# Altium PCB PCB2.PcbDoc
Units mm, origin at the board's own origin, x right, y up, seen from the top; angles counter-clockwise.
Board outline 80 x 70 mm, 2 copper layers (Top Layer, Bottom Layer); 32 components, 40 nets, 127 pads, 19 vias.
Unrouted connection lines stored in the file: 7.
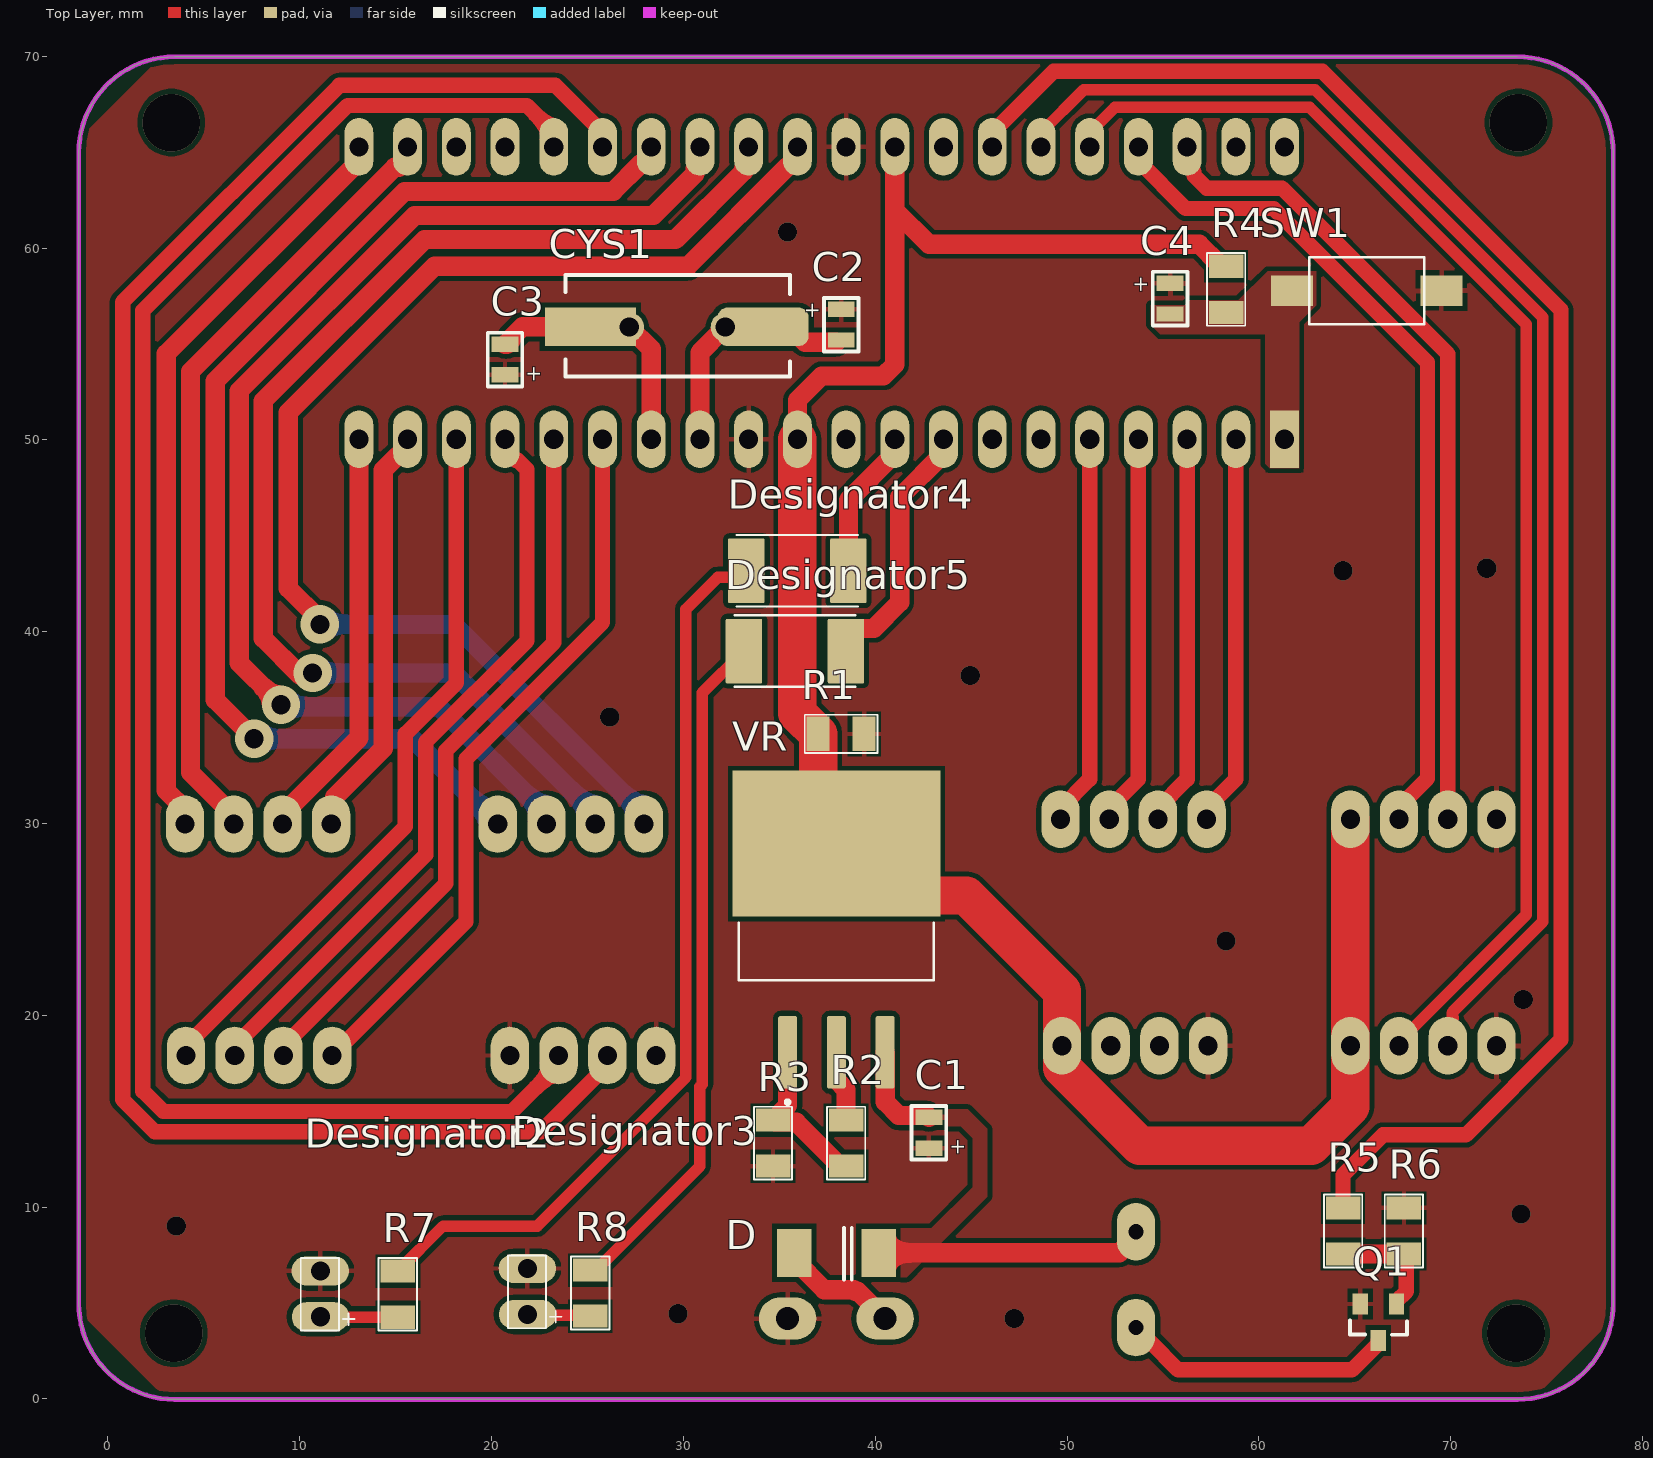
[diagram p0: Top Layer view]
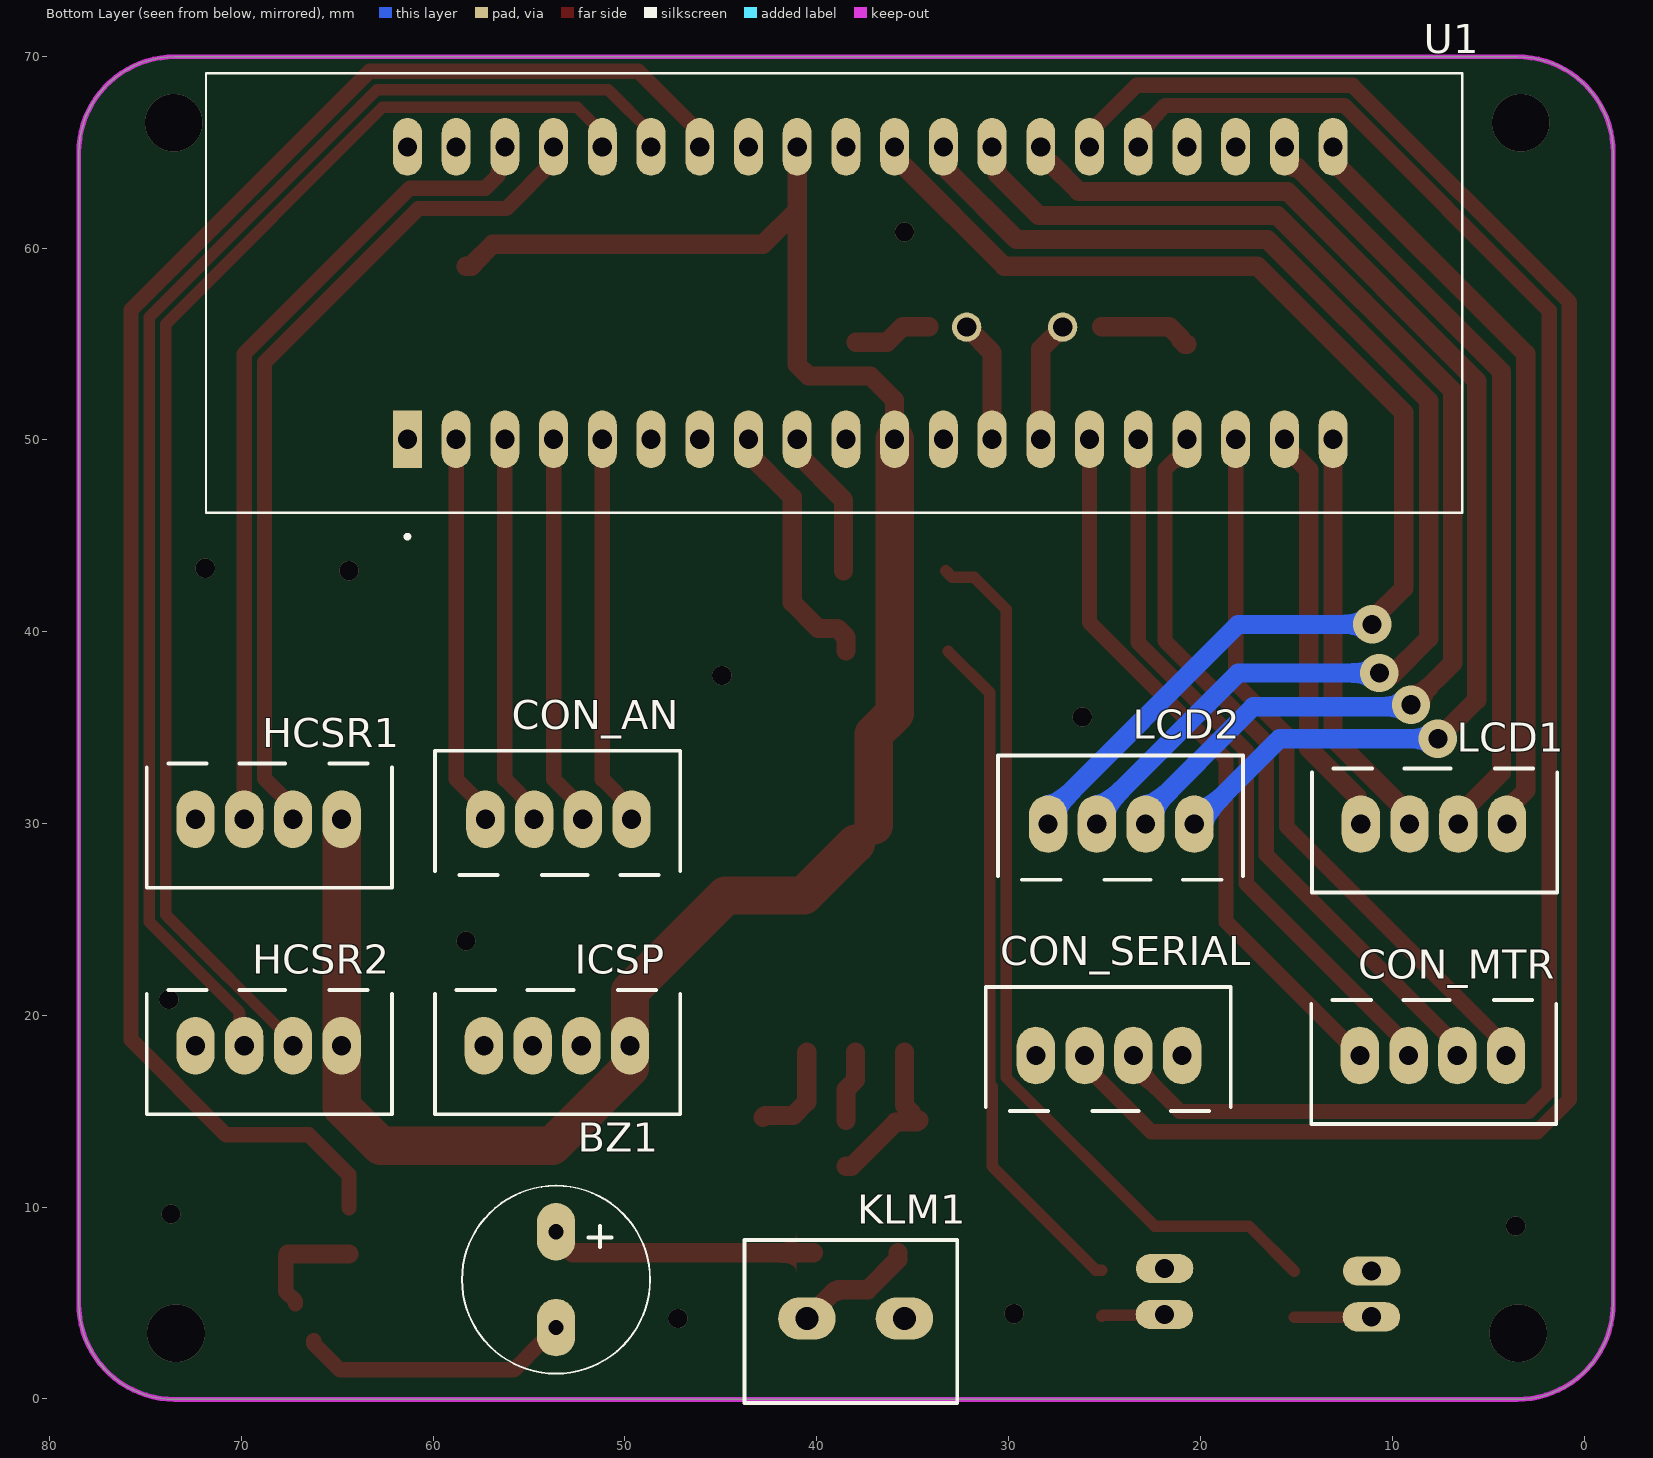
[diagram p1: Bottom Layer view, seen from below]
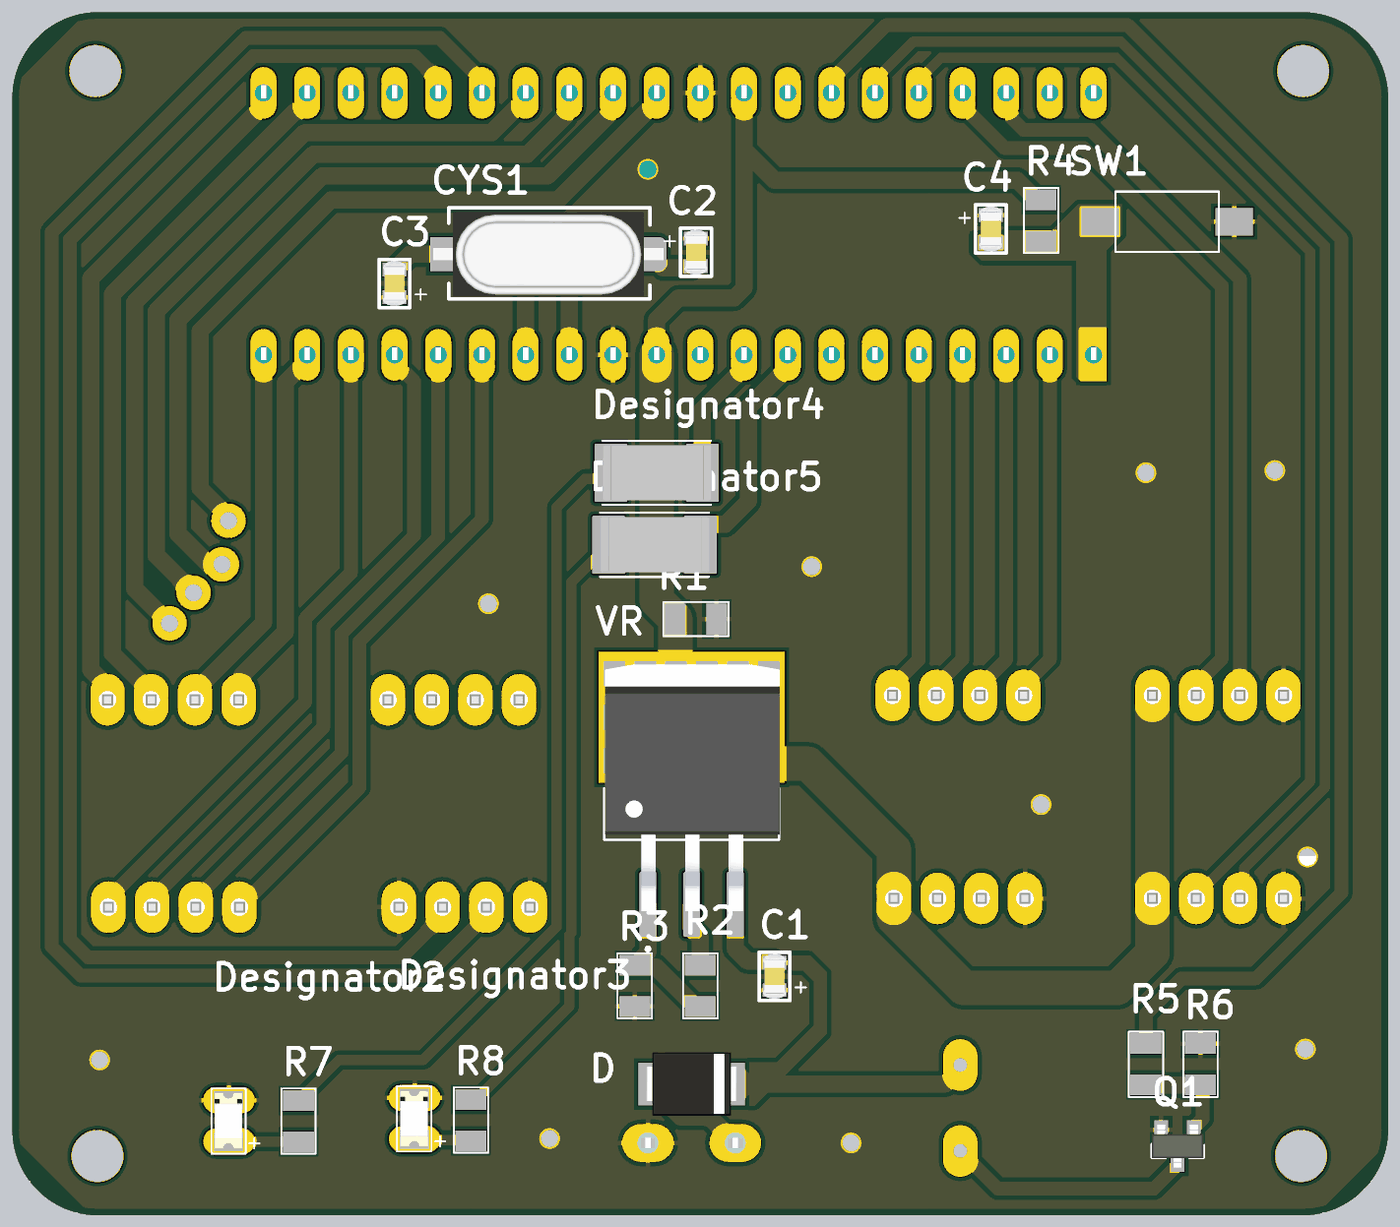
[diagram p2: 3D render of the assembled board from above, using the file's embedded part models]
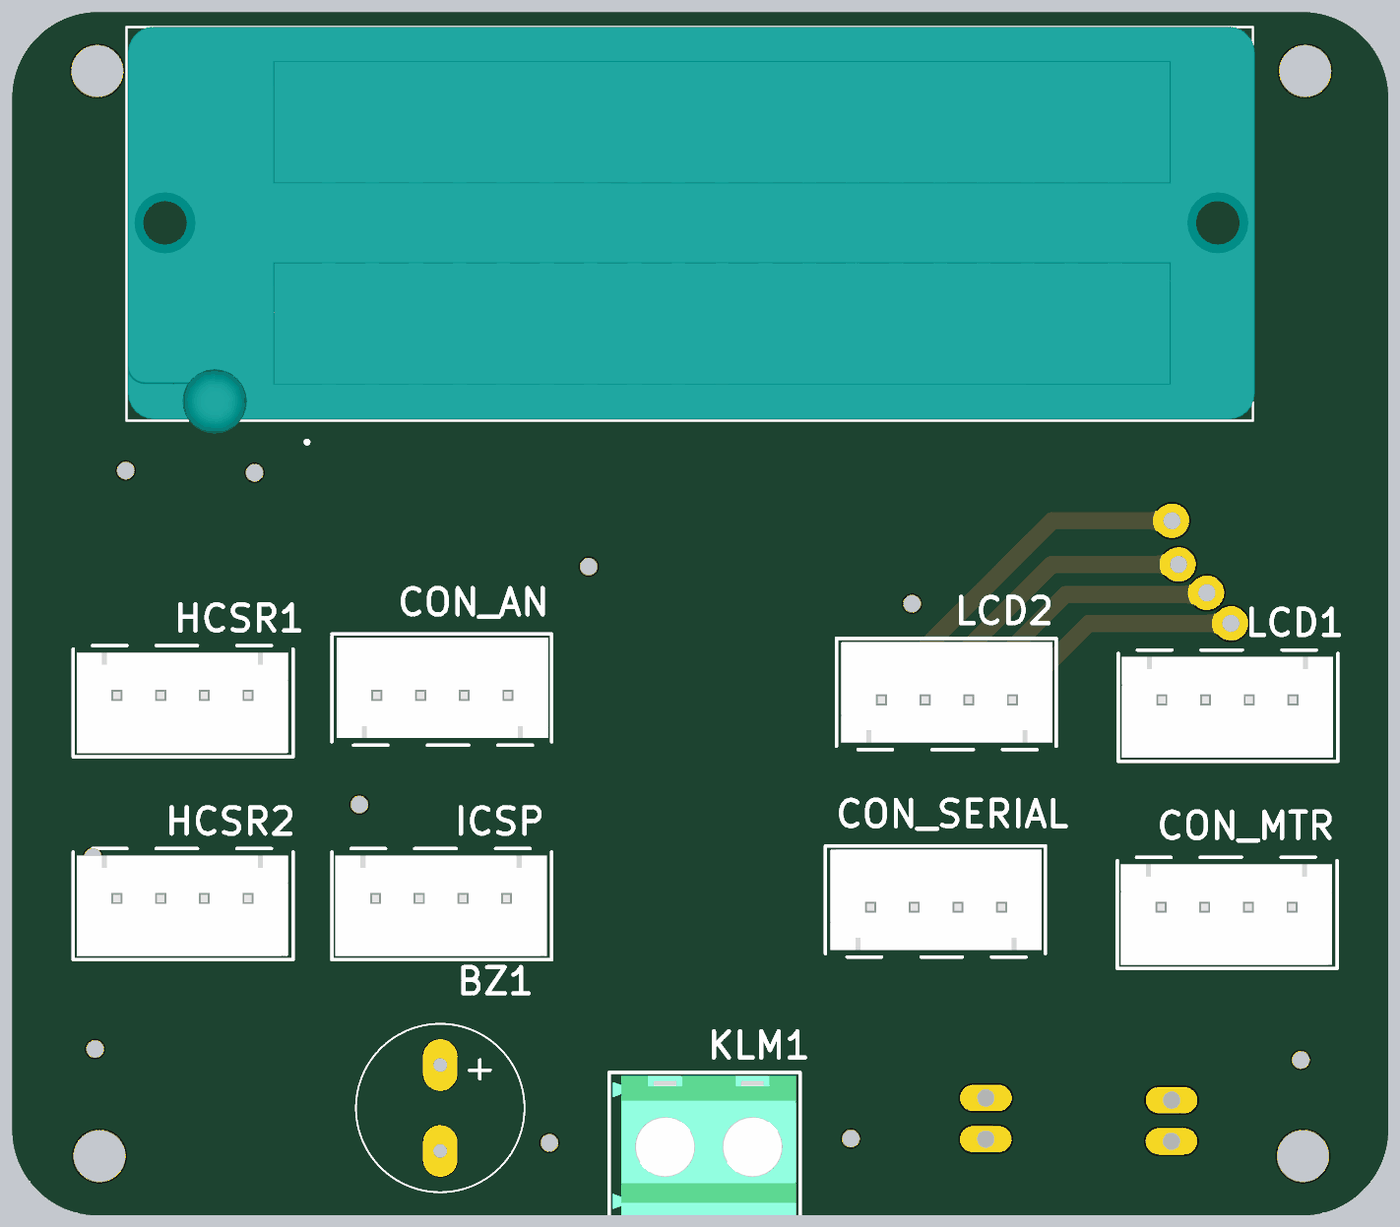
[diagram p3: 3D render of the assembled board from below, using the file's embedded part models]

## Layer stack, top to bottom
Top Solder: solder mask 0.0102, Solder Resist, Dk 3.5
Top Layer: signal copper 0.0356
Dielectric 1: dielectric 0.32, FR-4, Dk 4.8
Bottom Layer: signal copper 0.0356
Bottom Solder: solder mask 0.0102, Solder Resist, Dk 3.5

## Board outline
-1.524,4.977 -1.524,64.977 cw(c3.476,64.977) 3.476,69.977 73.476,69.977 cw(c73.476,64.977) 78.476,64.977 78.476,4.977 cw(c73.476,4.977) 73.476,-0.023 3.476,-0.023 cw(c3.476,4.977)

## Design rules (kind name [scope] priority, off if disabled: settings)
Clearance [All] p1: gap=0.254 ignorepadtopadclearanceinfootprint=FALSE except(0: Arc-Hole Track-Hole SMDPad-Hole THPad-Hole Via-Hole Fill-Hole Poly-Hole Region-Hole Text-Hole)
PolygonConnect [All] p1: connectstyle=Relief reliefconductorwidth=0.254 reliefentries=4 polygonreliefangle="90 Angle" airgapwidth=0.254
RoutingVias [All] p1: holewidth=0.711 width=1.27 viastyle="Through Hole" minholewidth=0.711 minwidth=1.27 maxholewidth=0.711 maxwidth=1.27
SolderMaskExpansion [All] p1: expansion=0.102 istentingtop=FALSE
Width [All] p1: maxlimit=2 minlimit=0.254 preferedwidth=0.254
30 further rules are at their usual default settings.

## Classes and differential pairs
component class Sheet2: BZ1 C1 C2 C3 C4 CON_AN CON_MTR CON_SERIAL CYS1 D HCSR1 HCSR2 ICSP KLM1 L1 L2 LCD1 LCD2 Q1 R1 R2 R3 R4 R5 R6 R7 R8 SW1 U1 VR

## Components (designator, comment, footprint, x,y, rotation, side; value= is the part's Value field where it differs from the comment)
BZ1 "Buzzer" CMI-9605IC 53.594,6.223 r180 bottom
C1 "CAP 100nF 0805" CAP_805 42.799,13.881 r90 top
C2 "CAP 22uf 0805" CAP_805 38.227,56.007 r270 top
C3 "CAP 22uf 0805" CAP_805 20.701,54.191 r90 top
C4 "CAP 100nF 0805" CAP_805 55.372,57.366 r270 top
CON_AN "4 PIN CON" "4 PIN 2.54MM" 53.467,30.226 r180 bottom
CON_MTR "4 PIN CON" "4 PIN 2.54MM" 7.874,17.907 r0 bottom
CON_SERIAL "4 PIN CON" "4 PIN 2.54MM" 24.765,17.907 r180 bottom
CYS1 "CRYSTAL - TH" "Kristal - HC-49Us -th" 29.651,55.899 r180 top
D "S3M Diyot" DO214AA 37.973,7.62 r0 top
Designator2 "Comment" "LED - TH" 11.049,5.461 r90 top
Designator3 "Comment" "LED - TH" 21.844,5.588 r90 top
Designator4 "Comment" RESC6331X70N 35.941,43.18 r0 top
Designator5 "Comment" RESC6331X70N 35.814,38.989 r0 top
HCSR1 "4 PIN CON" "4 PIN 2.54MM" 68.58,30.226 r0 bottom
HCSR2 "4 PIN CON" "4 PIN 2.54MM" 68.58,18.415 r0 bottom
ICSP "4 PIN CON" "4 PIN 2.54MM" 53.545,18.415 r0 bottom
KLM1 "2 Pin Klemens" "5.08mm-2 pin" 37.973,4.191 r180 bottom
LCD1 "4 PIN CON" "4 PIN 2.54MM" 7.825,29.972 r0 bottom
LCD2 "4 PIN CON" "4 PIN 2.54MM" 24.13,29.972 r180 bottom
Q1 "SSM3K357R,LF" SOT-23F 66.228,4.003 r180 top
R1 "RES 10K 1206" RES_1206 38.227,34.671 r0 top
R2 "RES 10K 1206" RES_1206 38.481,13.335 r270 top
R3 "RES 10K 1206" RES_1206 34.671,13.335 r90 top
R4 "RES 10K 1206" RES_1206 58.293,57.855 r90 top
R5 "RES 10K 1206" RES_1206 64.389,8.763 r270 top
R6 "RES 10K 1206" RES_1206 67.564,8.763 r90 top
R7 "RES 10K 1206" RES_1206 15.113,5.461 r90 top
R8 "RES 10K 1206" RES_1206 25.146,5.518 r90 top
SW1 "1437566-3" SW_1437566-3 65.622,57.785 r180 top
U1 "PIC16F887-I/P" PIC_ZIF_SOCKET 37.211,57.658 r90 bottom
VR "LM1085IS-ADJ" TO254P1524X483-4N 37.973,24.476 r90 top

## Footprints (in the part's own frame and the unit in brackets; to place one, negate y for a bottom-side part, rotate by r counter-clockwise, add the part's x,y. Pads: shape width x height; smd on the part's side, far side on the other; paste and mask are expansions set on the pad)
"4 PIN 2.54MM" [mm]
  oval 2x3 hole 1 mask+0.05: 1(-3.81,0) 2(-1.27,0) 3(1.27,0) 4(3.81,0)
  silkscreen extent -6.43,-2.9 6.35,3.57, body extent -6.15,-2.49 6.15,3.35, height 7.21
"5.08mm-2 pin" [mm]
  oval 3x2.2 hole 1.2 mask+0.05: 1(-2.54,0) 2(2.54,0)
  silkscreen extent -5.8,-4.4 5.3,4.1, body extent -5.59,-4.2 5.07,3.9, height 10.2
CAP_805 [mm]
  rect 0.8x1.4 smd mask+0.05: 1(-0.8,0) 2(0.8,0)
  silkscreen extent -1.4,-0.9 1.4,0.9, body extent -1.3,-0.68 1.3,0.68, height 0.9
CMI-9605IC [mm]
  oval 2x3 hole 0.8 mask+0.05: 1(0,2.5) 2(0,-2.5)
  silkscreen extent -4.9,-4.9 4.9,4.9, body extent -4.8,-4.8 4.8,5.9, height 5.2
DO214AA [mm]
  rect 1.8x2.5 smd mask+0.05: 1(-2.2,0) 2(2.2,0)
  silkscreen extent 0.4,-1.4 0.8,1.3, body extent -2.65,-1.85 2.65,1.85, height 2.3
"Kristal - HC-49Us -th" [mm]
  rrect50% 4.75x2 smd mask+0.05: 1(-4.5,0)
  rect 4.75x2 smd mask+0.05: 2(4.5,0)
  round 1.524 hole 1: 3(-2.531,0.019) 4(2.473,0.019)
  silkscreen extent -5.9,-2.7 5.8,2.6, body extent -6.7,-2.45 6.7,2.45, height 5.08
"LED - TH" [mm]
  rect 1.1x1.7 smd mask+0.05: 1(-1.2,0) 2(1.2,0)
  oval 1.524x3 hole 1: 19(-1.178,-0.032) 20(1.218,-0.023)
  silkscreen extent -1.9,-1.8 1.9,1, body extent -1.59,-0.8 1.61,0.8, height 1.1
PIC_ZIF_SOCKET [mm]
  rect 3x1.508 hole 1: 1(-7.62,24.13)
  oval 3x1.508 hole 1: 2(-7.62,21.59) 3(-7.62,19.05) 4(-7.62,16.51) 5(-7.62,13.97) 6(-7.62,11.43) 7(-7.62,8.89) 8(-7.62,6.35) 9(-7.62,3.81) 10(-7.62,1.27) 11(-7.62,-1.27) 12(-7.62,-3.81) 13(-7.62,-6.35) 14(-7.62,-8.89) 15(-7.62,-11.43) 16(-7.62,-13.97) 17(-7.62,-16.51) 18(-7.62,-19.05) 19(-7.62,-21.59) 20(-7.62,-24.13) 21(7.62,-24.13) 22(7.62,-21.59) 23(7.62,-19.05) 24(7.62,-16.51) 25(7.62,-13.97) 26(7.62,-11.43) 27(7.62,-8.89) 28(7.62,-6.35) 29(7.62,-3.81) 30(7.62,-1.27) 31(7.62,1.27) 32(7.62,3.81) 33(7.62,6.35) 34(7.62,8.89) 35(7.62,11.43) 36(7.62,13.97) 37(7.62,16.51) 38(7.62,19.05) 39(7.62,21.59) 40(7.62,24.13)
  silkscreen extent -12.8,-30.87 11.45,34.63, body extent -12.19,-30.99 11.49,34.54, height 23.62
RES_1206 [mm]
  rect 1.2x1.8 smd mask+0.05: 1(-1.2,0) 2(1.2,0)
  silkscreen extent -1.9,-1 1.9,1, body extent -1.57,-0.82 1.57,0.82, height 0.53
RESC6331X70N [mm]
  rrect7% 1.9x3.37 smd: 1(-2.66,0) 2(2.66,0)
  silkscreen extent -3.15,-1.87 3.15,1.87, body extent -3.15,-1.6 3.2,1.6, height 0.58
SOT-23F [mm]
  rect 0.8x1.1 smd mask+0.05: 1(-0.95,-0.95) 2(0.95,-0.95) 3(0,0.95)
  silkscreen extent -1.5,-0.1 1.47,0.65, body extent -1.5,-1.25 1.5,1.25, height 1.1
SW_1437566-3 [mm]
  rect 2.18x1.6 smd: 1(-3.9,0) 2(3.9,0)
  silkscreen extent -3,-1.75 3,1.75
TO254P1524X483-4N [mm]
  rrect25% 3.79x0.99 smd: 1(-6.4,2.54) 2(-6.4,0) 3(-6.4,-2.54)
  rect 7.62x10.84 smd paste-6: 4(4.48,0)
  silkscreen extent -9.1,-5.08 0.35,5.08, body extent -6.81,-5.12 7.55,5.04, height 4.65

## Part data
BZ1: library part BUZZER, Designed by="Ahmet Azboy"
C1 C2 C3 C4: "0805 smd"
CON_AN CON_MTR CON_SERIAL HCSR1 HCSR2 ICSP LCD1 LCD2: "2.54mm vertical connector"
CYS1: "Smd tipi kristal"
D: Case/Package=DO214AA, Current=3A, Voltage=1000V
KLM1: "5.08mm 2 pin klemens"
Q1: "Trans MOSFET N-CH Si 60V 0.65A Automotive 3-Pin SOT-23F T/R", Case/Package=SOT23F, Manufacturer=Toshiba, Supplier Part Number 1=757-SSM3K357RLF, ComponentLink1Description=https://toshiba.semicon-storage.com/info/docget.jsp?did=59207&prodName=SSM3K357R&src-supplier=Digi-Key, ComponentLink1URL=https://toshiba.semicon-storage.com/info/docget.jsp?did=59207&prodName=SSM3K357R&src-supplier=Digi-Key, Designed by="Ahmet Azboy", Manufacturer Part Number=SSM3K357R,LF, Pricing 1="1=0,41000, 10=0,33600, 50=0,33600, 100=0,22900, 1000=0,12900, 10000=0,10300 (USD)", RoHS=No, Supplier 1=Mouser
SW1: "Switch Tactile OFF (ON) SPST Rectangular Button Gull Wing 0.05A 12VDC SMD Loose Piece", Package=None, Availability=Unavailable, MP=1437566-3, Price=None
U1: "MCU, 8-Bit, 14KB Flash, 368 RAM, 36 I/O, PDIP-40, PIC 16F Series", Package="PDIP-40 Microchip", Check_prices=https://www.snapeda.com/parts/PIC16F887-I/P/Microchip/view-part/?ref=eda, MF=Microchip, MP=PIC16F887-I/P, SnapEDA_Link=https://www.snapeda.com/parts/PIC16F887-I/P/Microchip/view-part/?ref=snap
VR: "3-A, 29-V, linear voltage regulator 3-DDPAK/TO-263", Package="TO-263-3 Texas Instruments", Arrow_Electronics-Purchase-URL=https://snapeda.com/shop?store=Arrow+Electronics&id=213969, Availability=Unavailable, DigiKey-Purchase-URL=https://snapeda.com/shop?store=DigiKey&id=213969, MF="Texas Instruments", Mouser-Purchase-URL=https://snapeda.com/shop?store=Mouser&id=213969, MP=LM1085IS-ADJ, Price=None, SnapEDA_Link=https://www.snapeda.com/parts/LM1085IS-ADJ/Texas%20Instruments/view-part/213969/?ref=snap

## Via types
v1: diameter 1, hole 1, Top Layer to Bottom Layer, 11 vias
v2: diameter 2, hole 1, Top Layer to Bottom Layer, 4 vias
v3: diameter 3, hole 3, Top Layer to Bottom Layer, 4 vias

## Nets (pads, with @x,y where several pads share a name; then routed paths per layer and width w, separated by ;. In a path a pad name is that pad's centre, name@x,y a point inside that pad or via, vN(x,y) a via of type N, cw(c..) or ccw(c..) an arc to the next point about the centre after c; other vN are vias at no path point)
+5V: HCSR1.1 HCSR2.1 ICSP.1 R1.1 R2.1 R4.2 U1.11 U1.32 VR.2 VR.4 | length 113.6
  Top Layer w1: U1.11 35.941,52.07 37.211,53.34 40.435,53.34 41.021,53.926 41.021,61.976 ; VR.2 37.973,16.637 38.481,16.129 R2.1 ; U1.32 41.021,61.976 ; R4.2 57.993,59.055 57.893,59.155 57.893,59.201 56.896,60.198 42.799,60.198 41.021,61.976
  Top Layer w2: U1.11 35.941,35.757 R1.1 VR.4@37.027,29.902 ; VR.4 40.677,26.252 44.741,26.252 49.735,21.258 ICSP.1 49.735,17.267 53.794,13.208 62.738,13.208 64.77,15.24 HCSR2.1 HCSR1.1
+12V: BZ1.1 C1.2 D.2 VR.3 | length 19.2
  Top Layer w1: D.2 52.72,7.62 53.594,8.494 BZ1.1 ; VR.3 40.518,18.071 40.518,15.489 41.226,14.781 42.699,14.781 C1.2
+12V_D: D.1 KLM1.1 | length 6.4
  Top Layer w1: D.1 35.773,7.27 37.344,5.699 38.878,5.699 38.961,5.616 39.083,5.616 39.735,4.964 39.735,4.894 40.438,4.191 KLM1.1
AN1: CON_AN.1 U1.2 | length 20.4
  Top Layer w0.8: CON_AN.1 57.277,30.789 58.801,32.313 U1.2
AN2: CON_AN.2 U1.3 | length 20.4
  Top Layer w0.8: CON_AN.2 54.737,30.789 56.261,32.313 U1.3
AN3: CON_AN.3 U1.4 | length 20.4
  Top Layer w0.8: CON_AN.3 52.197,30.789 53.721,32.313 U1.4
AN4: CON_AN.4 U1.5 | length 20.4
  Top Layer w0.8: CON_AN.4 49.657,30.789 51.181,32.313 U1.5
AN5: U1.7
BUZZER_TRIG: R5.1 U1.34 | length 90.9
  Top Layer w0.8: U1.34 46.101,66.024 49.292,69.215 63.322,69.215 75.752,56.785 75.752,18.729 70.79,13.767 66.472,13.767 64.389,11.684 R5.1
CLK: ICSP.3 U1.39
DAT: ICSP.2 U1.40
ECHO1: HCSR1.3 U1.38 | length 43
  Top Layer w0.8: U1.38 56.261,64.34 56.615,63.986 56.615,63.781 57.272,63.124 61.209,63.124 69.85,54.483 HCSR1.3
ECHO2: HCSR2.2 U1.36 | length 69.1
  Top Layer w0.6: U1.36 51.181,66.024 52.489,67.332 62.648,67.332 73.944,56.036 73.944,25.241 67.31,18.607 HCSR2.2
GND: C1.1 C2.1 C3.1 C4.1 CON_SERIAL.1 CON_SERIAL.4 Designator2.2 Designator2.20 Designator3.2 Designator3.20 HCSR1.4 HCSR2.4 ICSP.4 KLM1.2 Q1.2 R1.2 R3.1 R6.2 SW1.1 U1.12 U1.31
  other v1: 47.244,4.191 29.718,4.445 3.556,9.017 73.66,9.652 73.787,20.828 58.293,23.876 26.162,35.56 44.958,37.719 64.389,43.18 71.882,43.307 35.433,60.833
LCD1: LCD1.4 U1.19 | length 21.9
  Top Layer w1: LCD1.4 11.826,30.163 11.826,31.384 14.351,33.909 14.351,48.429 15.116,49.195 15.386,49.195 15.621,49.429 U1.19
LCD2: LCD1.3 U1.20 | length 21.7
  Top Layer w1: LCD1.3 9.095,30.472 13.081,34.458 U1.20
LCD3: LCD1.1 U1.21 | length 39.9
  Top Layer w1: LCD1.1 4.015,30.743 3.04,31.717 3.04,54.491 13.081,64.532 U1.21
LCD4: LCD1.2 U1.22 | length 41.1
  Top Layer w1: LCD1.2 6.555,30.413 4.294,32.673 4.294,53.556 14.952,64.214 15.166,64.214 15.621,64.669 U1.22
LCD5: LCD2.4 U1.27 | length 62.3
  Top Layer w1: v2(7.62,34.417) 5.588,36.449 5.588,53.077 15.471,62.96 26.342,62.96 27.816,64.435 28.086,64.435 28.321,64.669 U1.27
  Bottom Layer w1: v2(7.62,34.417) 15.875,34.417 19.629,30.663 19.858,30.663 20.32,30.201 LCD2.4
LCD6: LCD2.3 U1.28 | length 63.5
  Top Layer w1: v2@8.687,36.525 6.842,38.37 6.842,52.557 15.991,61.706 28.432,61.706 30.607,63.881 30.607,64.141 30.861,64.395 U1.28
  Bottom Layer w1: v2(9.017,36.195) 9.12,36.092 17.24,36.092 22.86,30.472 LCD2.3
LCD7: LCD2.2 U1.29 | length 64.8
  Top Layer w1: v2@10.036,37.716 8.096,39.656 8.096,52.038 16.51,60.452 29.591,60.452 33.147,64.008 33.147,64.141 33.401,64.395 U1.29
  Bottom Layer w1: v2(10.668,37.846) 18.026,37.846 25.4,30.472 LCD2.2
LCD8: LCD2.1 U1.30 | length 65.9
  Top Layer w1: v2(11.049,40.386) 11.049,40.62 9.398,42.271 9.398,51.435 17.018,59.055 30.226,59.055 35.449,64.278 35.55,64.278 35.941,64.669 U1.30
  Bottom Layer w1: v2(11.049,40.386) 18.026,40.386 27.94,30.472 LCD2.1
LED1: Designator5.1 Designator5.2 R8.2 U1.8 | length 49.5
  Top Layer w0.6: R8.2 25.446,6.718 30.861,12.133 30.861,16.288 30.983,16.41 30.983,36.818 Designator5.1
  Top Layer w1: Designator5.2 38.474,39.724 38.924,40.174 39.92,40.174 41.281,41.535 41.281,47.012 43.561,49.292 U1.8
LED2: Designator4.1 Designator4.2 R7.2 U1.9 | length 55.5
  Top Layer w0.6: R7.2 17.469,9.017 22.383,9.017 30.129,16.763 30.129,41.178 31.782,42.831 32.932,42.831 Designator4.1
  Top Layer w1: Designator4.2 38.601,46.872 41.021,49.292 U1.9
MCLR: C4.2 R4.1 SW1.2 U1.1
MTR_CNTRL1: CON_MTR.4 U1.15 | length 38
  Top Layer w0.8: CON_MTR.4 18.666,24.889 18.666,31.157 18.667,31.158 18.667,33.372 25.781,40.486 U1.15
MTR_CNTRL2: CON_MTR.3 U1.16 | length 38
  Top Layer w0.8: CON_MTR.3 9.144,18.407 17.612,26.875 17.612,31.594 17.613,31.595 17.613,33.809 23.241,39.437 U1.16
MTR_CNTRL3: CON_MTR.2 U1.17 | length 39
  Top Layer w0.8: CON_MTR.2 6.604,18.407 16.558,28.361 16.558,32.03 16.559,32.031 16.559,34.245 21.844,39.53 21.844,48.469 21.375,48.938 21.247,48.938 20.701,49.484 U1.17
MTR_CNTRL4: CON_MTR.1 U1.18 | length 38
  Top Layer w0.8: CON_MTR.1 4.064,18.407 15.504,29.847 15.504,33.43 15.505,33.431 15.505,34.682 18.161,37.338 U1.18
NetBZ1_2: BZ1.2 Q1.3 | length 14.4
  Top Layer w0.8: BZ1.2 53.594,3.548 54.148,2.993 54.324,2.993 55.793,1.524 64.849,1.524 66.228,2.903 Q1.3
NetL1_1: Designator2.1 Designator2.19 R7.1 | length 4
  Top Layer w0.6: Designator2.19 11.092,4.272 15.102,4.272 R7.1
NetL2_1: Designator3.1 Designator3.19 R8.1 | length 3.3
  Top Layer w0.6: Designator3.19 21.922,4.364 25.1,4.364 R8.1
NetQ1_1: Q1.1 R5.2 R6.1 | length 6.1
  Top Layer w0.8: Q1.1 67.178,5.103 67.691,5.616 67.691,7.436 R6.1
  Top Layer w1: R5.2 R6.1
NetR2_2: R2.2 R3.2 VR.1 | length 8.8
  Top Layer w1: VR.1 35.433,15.297 35.071,14.935 35.071,14.635 34.971,14.535 R3.2 34.771,14.435 35.881,14.435 38.181,12.135 R2.2
OSC1: C2.2 CYS1.1 CYS1.3 U1.13 | length 10.3
  Top Layer w1: U1.13 30.861,54.559 CYS1.3@32.055,55.753 ; CYS1.1 35.526,55.899 36.334,55.091 C2.2@37.954,55.091
OSC2: C3.2 CYS1.2 CYS1.4 U1.14 | length 11.2
  Top Layer w1: C3.2 20.801,54.991 21.023,55.213 21.023,55.313 21.609,55.899 CYS1.2 ; CYS1.4 28.321,54.737 U1.14
RX: CON_SERIAL.2 U1.26 | length 100.9
  Top Layer w0.8: U1.26 25.781,66.024 23.319,68.486 12.061,68.486 0.762,57.187 0.762,15.615 2.445,13.932 22.56,13.932 26.035,17.407 CON_SERIAL.2
TRIG1: HCSR1.2 U1.37 | length 44.6
  Top Layer w0.8: U1.37 53.721,64.532 56.183,62.07 60.772,62.07 68.796,54.046 68.796,32.351 67.31,30.865 HCSR1.2
TRIG2: HCSR2.3 U1.35 | length 72.8
  Top Layer w0.6: U1.35 48.641,66.024 50.878,68.261 62.927,68.261 74.798,56.39 74.798,24.887 70.104,20.193 70.104,18.669 HCSR2.3
TX: CON_SERIAL.3 U1.25 | length 91.5
  Top Layer w0.8: U1.25 23.241,66.024 21.833,67.432 12.498,67.432 1.816,56.75 1.816,16.052 2.882,14.986 21.074,14.986 23.495,17.407 CON_SERIAL.3
pads on no net: U1.6 U1.10 U1.23 U1.24 U1.33
copper on no net:
  other v3: 3.429,3.429 73.406,3.429 3.302,66.548 73.533,66.548

## Polygon pours and split planes (outlines as drawn)
GND on Top Layer "GND_L01_P002" (solid, pour order 2): 2.304,0.744 ccw(c4.1,2.54) 4.1,0 74.295,0 77.615,3.32 ccw(c75.819,5.116) 78.359,5.116 78.359,66.189 ccw(c77.492,66.189) 78.105,66.802 75.674,69.233 ccw(c73.878,67.437) 73.878,69.977 2.794,69.977 -0.985,66.198 ccw(c0.316,64.897) -1.524,64.897 -1.524,4.752 ccw(c-1.09,4.752) -1.397,4.445 -1.524,4.752 ccw(c-1.09,4.752) -1.397,4.445
+12V on Top Layer "+12V_L01_P001" (solid, pour order 1): 39.37,8.89 42.926,8.89 45.085,11.049 45.085,13.589 44.45,14.224 41.91,14.224 39.878,16.256 40.005,16.383 40.005,20.066 41.021,20.066 41.148,19.939 41.148,16.002 42.037,15.113 44.831,15.113 45.847,14.097 45.847,10.541 41.656,6.35 39.243,6.35 39.243,8.763
MCLR on Top Layer "MCLR_L01_P000" (solid, pour order 0): 60.579,48.514 62.103,48.514 62.103,56.134 62.992,57.023 62.992,58.801 60.452,58.801 58.928,57.277 56.388,57.277 56.134,57.023 54.356,57.023 54.356,56.007 54.864,55.499 60.325,55.499 60.325,48.768

## Keep-outs
Keep-Out Layer:
  the board outline again, w0.254

## Text inside footprints (layer, text, board x,y; h text height)
C1: Top Overlay "+" at 44.632,12.681 h0.8 r90
C2: Top Overlay "+" at 36.394,57.207 h0.8 r270
C3: Top Overlay "+" at 22.534,52.991 h0.8 r90
C4: Top Overlay "+" at 53.539,58.566 h0.8 r270